# Altium PCB LPCB224R0.PcbDoc (part 1 of 2)
Units mm, origin at the board's own origin, x right, y up, seen from the top; angles counter-clockwise.
Board outline 139 x 166 mm, 4 copper layers (Top Layer, Internal Plane 1, Mid-Layer 1, Bottom Layer); 91 components, 73 nets, 403 pads, 171 vias.
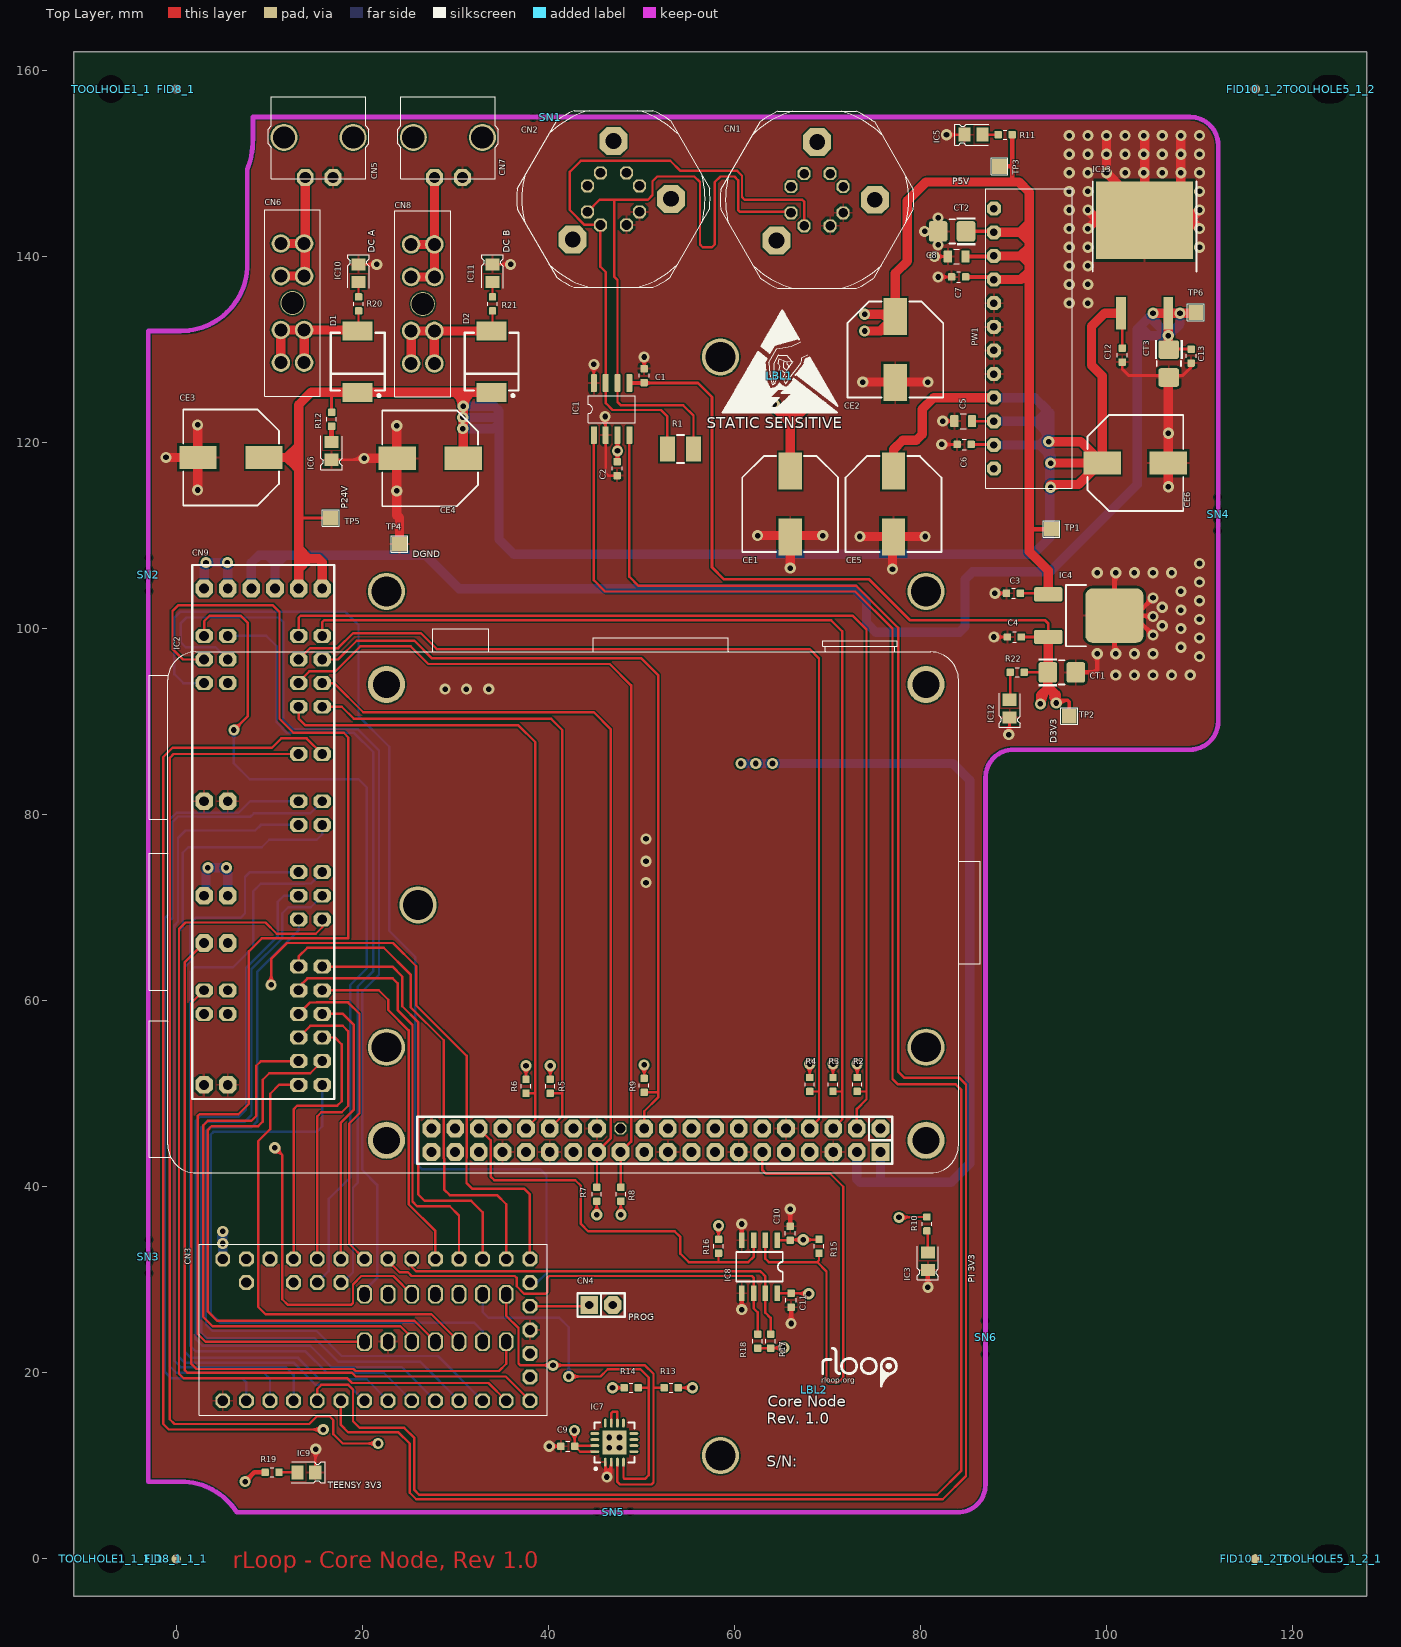
[diagram p0: Top Layer view]
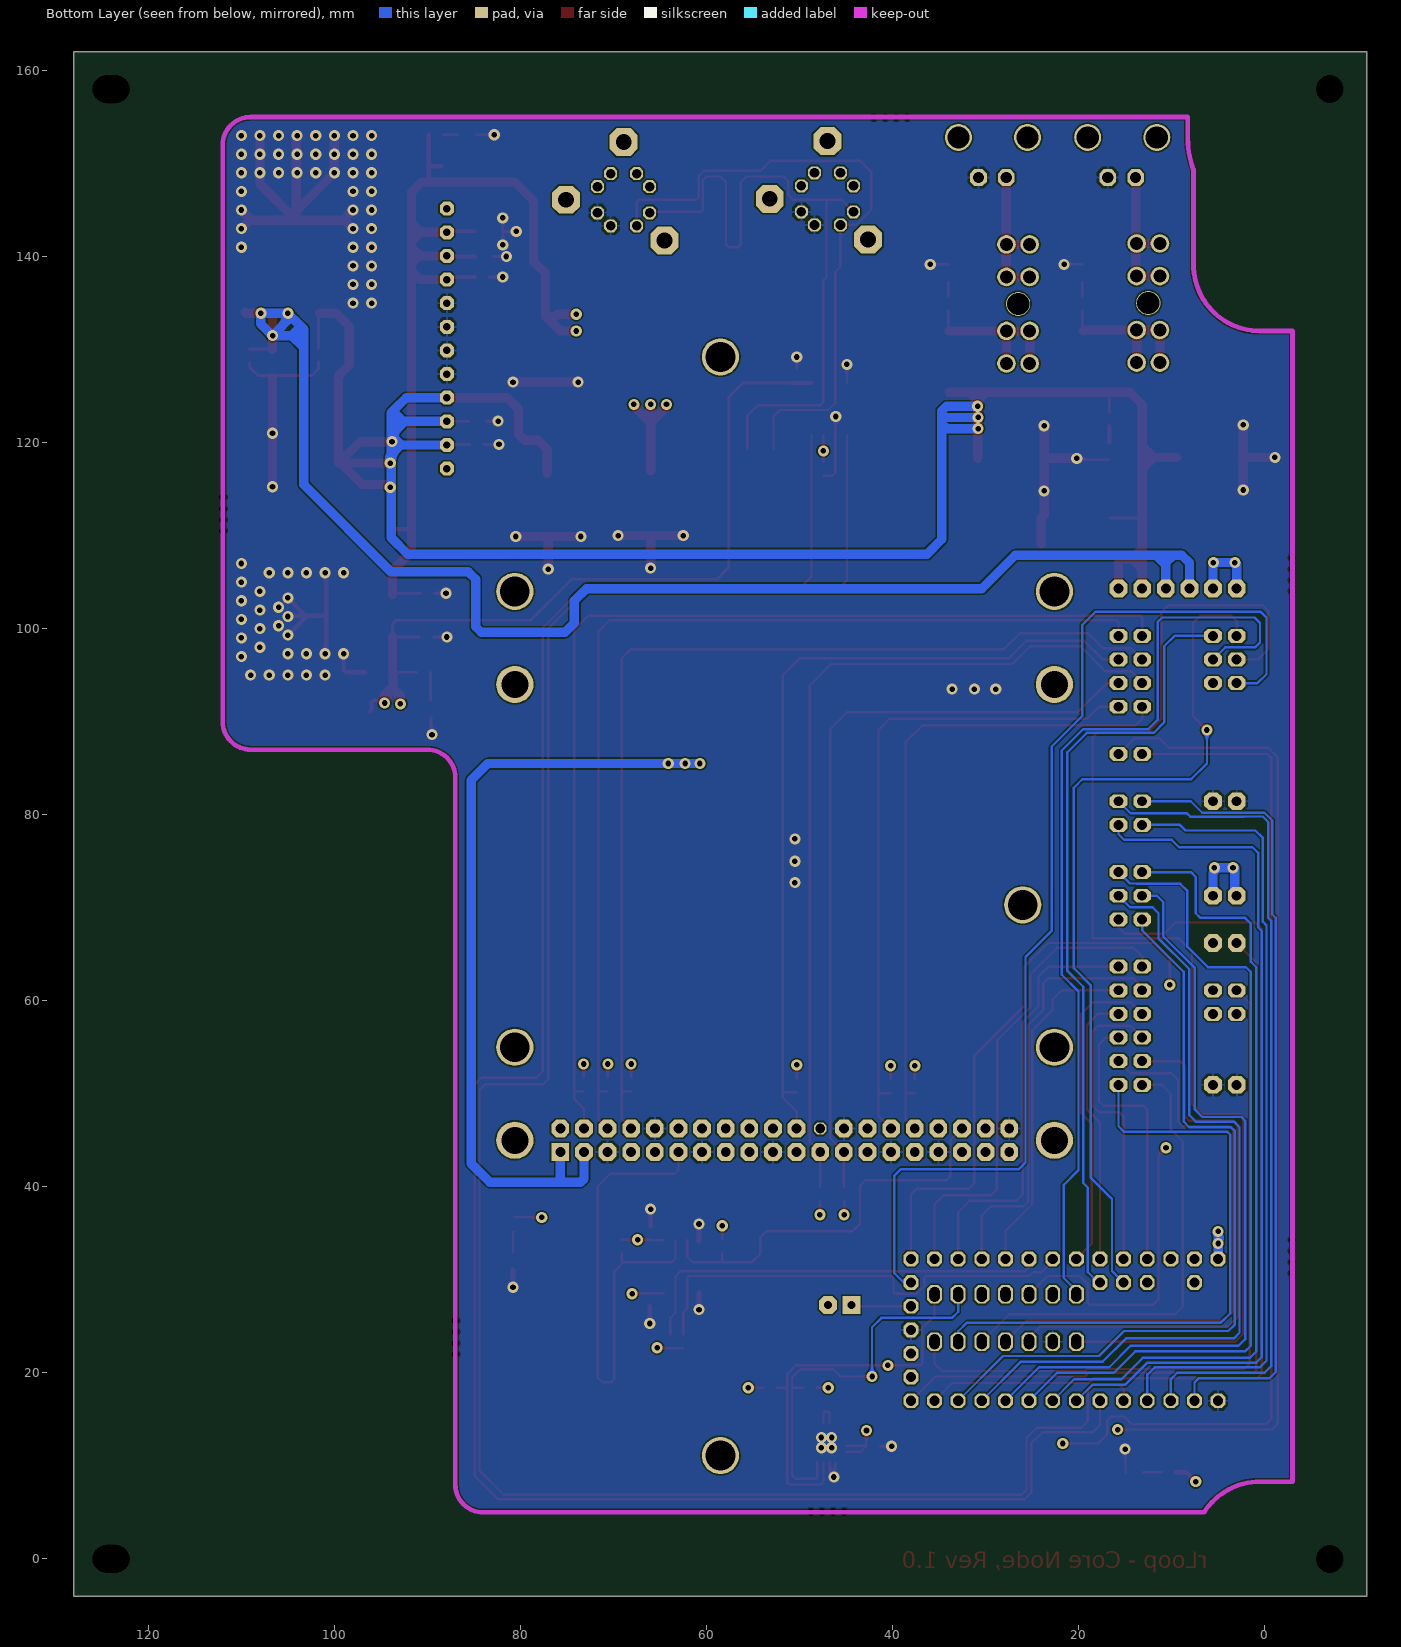
[diagram p1: Bottom Layer view, seen from below]
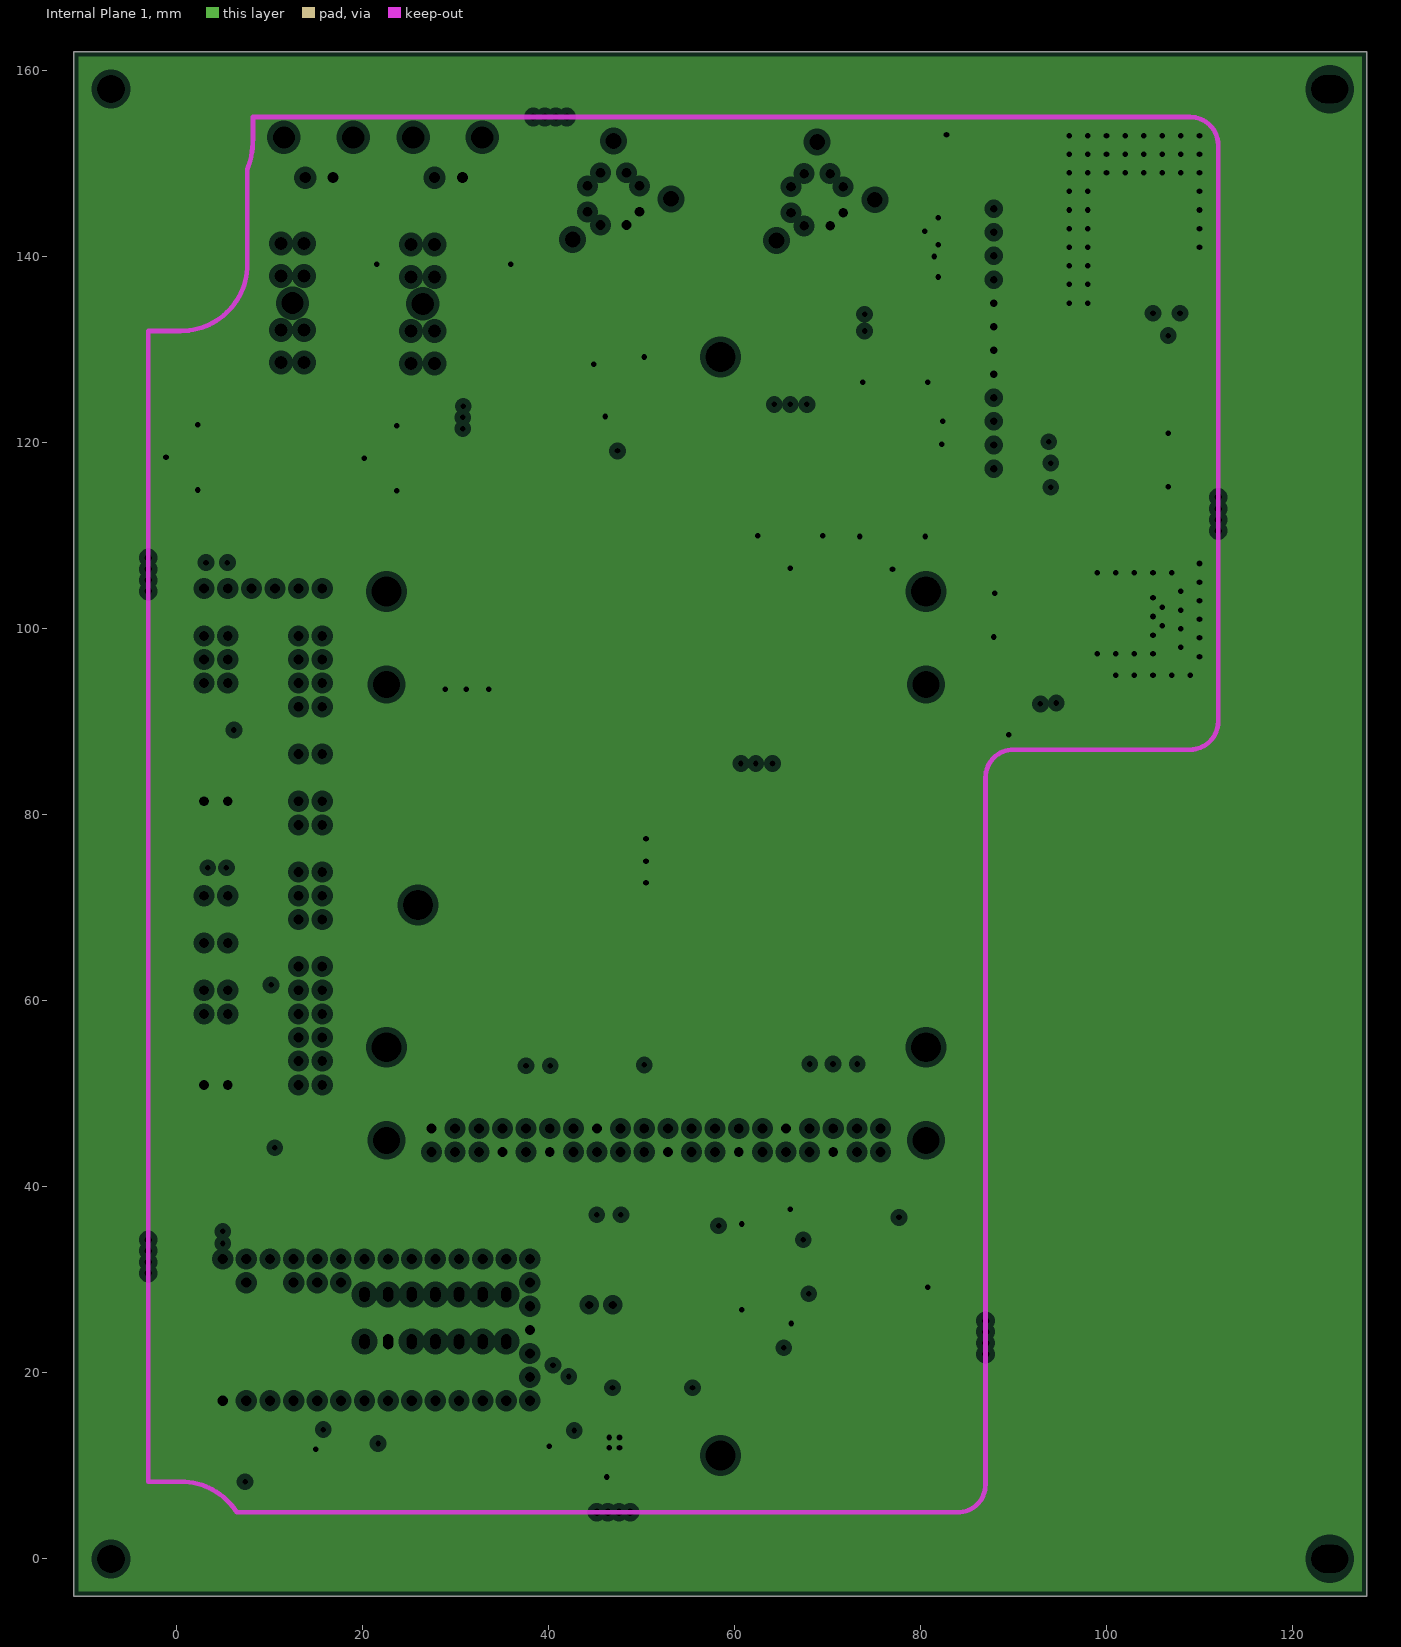
[diagram p2: Internal Plane 1, clearances drawn from the general rule]
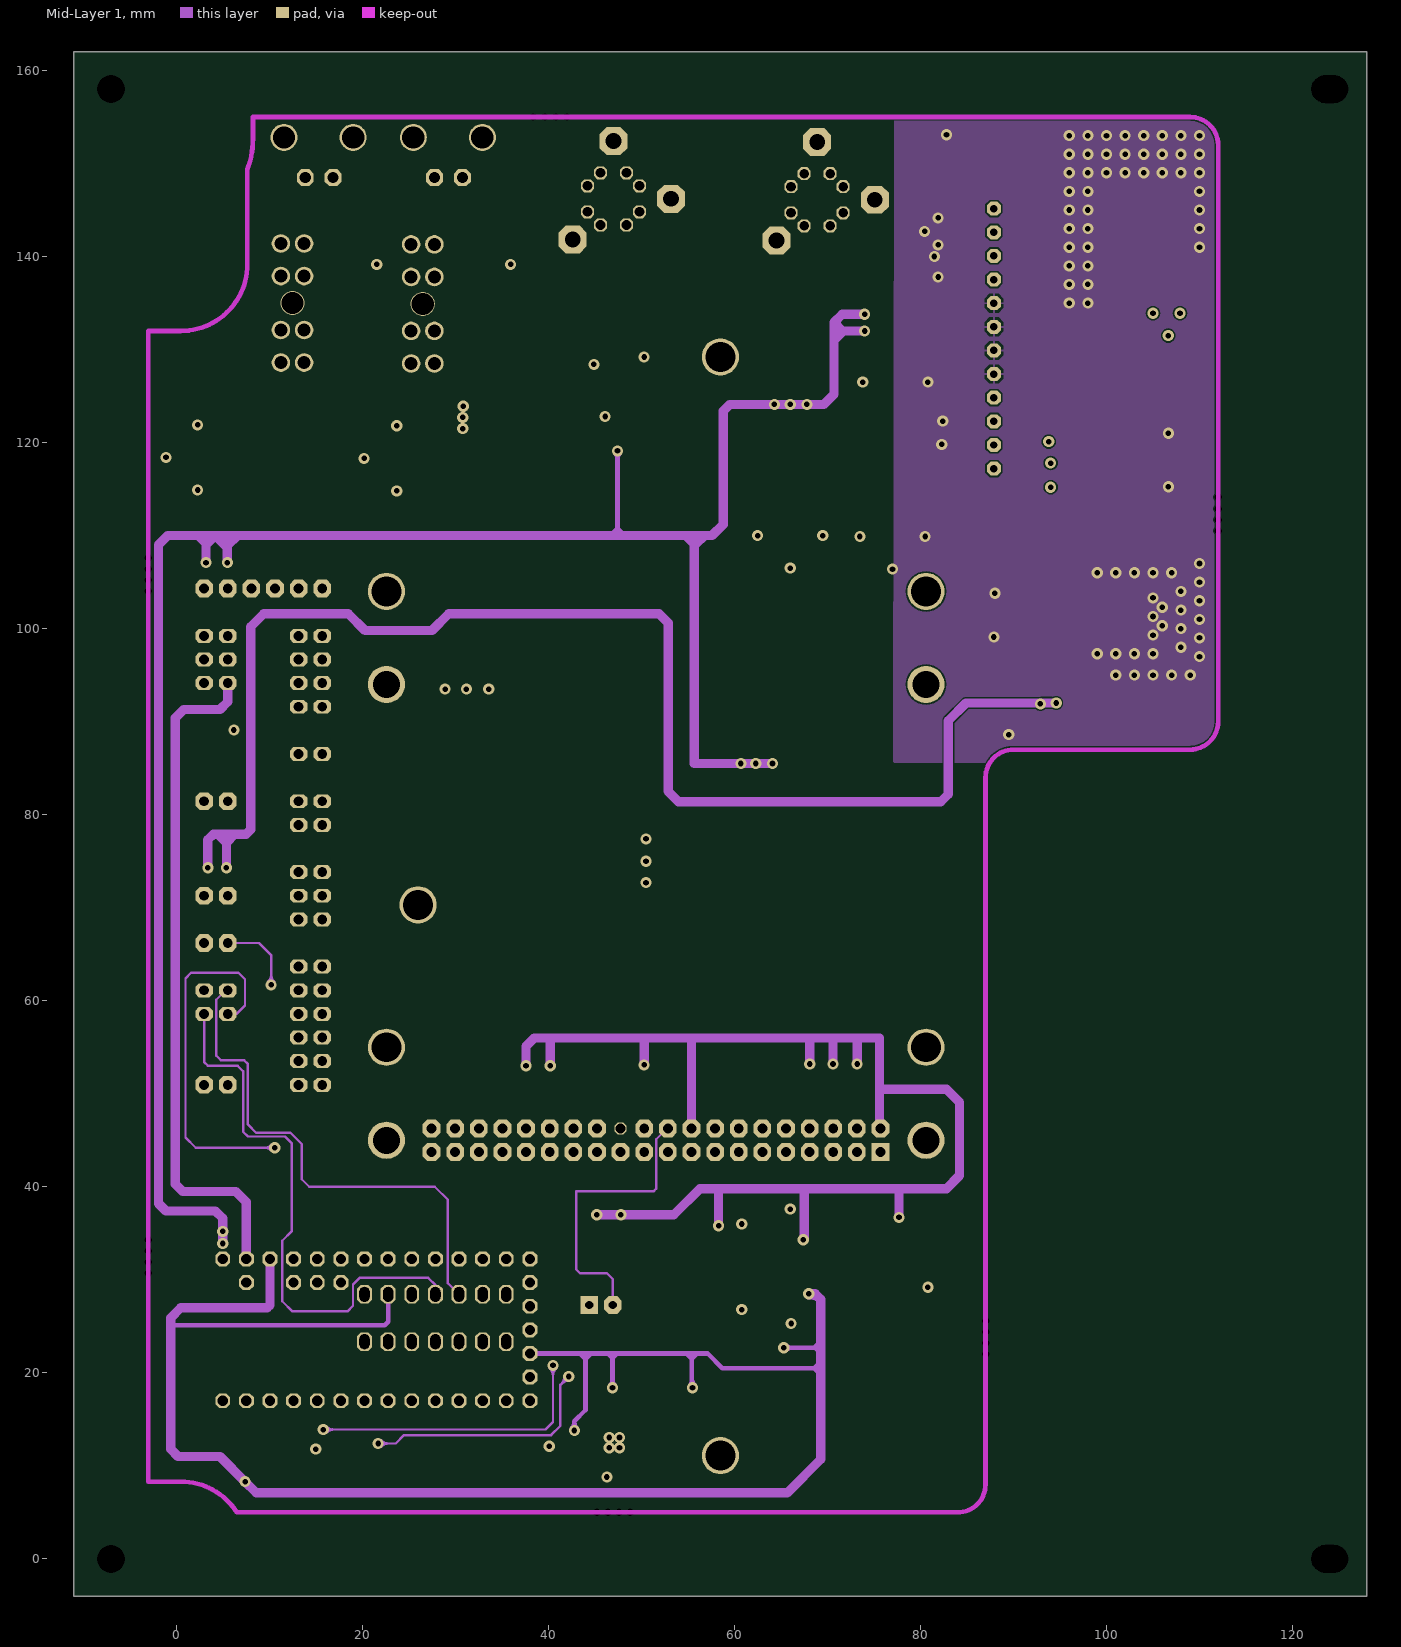
[diagram p3: Mid-Layer 1]

## Layer stack, top to bottom
Top Layer: signal copper 0.0356
Dielectric: core 0.32, FR-4, Dk 4.8
Internal Plane 1: plane copper 0.0356, net DGND
Dielectric: prepreg 0.32, FR-4, Dk 4.8
Mid-Layer 1: signal copper 0.0356
Dielectric: core 0.32, FR-4, Dk 4.8
Bottom Layer: signal copper 0.0356

## Board outline
-11,-4 -11,162 128,162 128,-4

## Design rules (kind name [scope] priority, off if disabled: settings)
Clearance [All] p1: gap=0.16
HoleSize [All] p1: absolutevalues=TRUE maxlimit=4 minlimit=0.025 maxpercent=80.000 minpercent=20.000
MinimumSolderMaskSliver [All] p1 off: minsoldermaskwidth=0.1
PlaneClearance [All] p1: clearance=0.6
PlaneConnect [All] p1: planeconnectstyle=Direct reliefexpansion=0.508 reliefentries=4 reliefconductorwidth=0.254 reliefairgap=0.254
PolygonConnect [isVia] p1: connectstyle=Direct reliefconductorwidth=0.254 reliefentries=4 polygonreliefangle="90 Angle" airgapwidth=0.254
PolygonConnect PolygonConnect_1 [All] p2: connectstyle=Relief reliefconductorwidth=0.254 reliefentries=4 polygonreliefangle="90 Angle" airgapwidth=0.254
RoomDefinition "LPCB224 - OVERVIEW" [InComponentClass('LPCB224 - OVERVIEW')] p1: confinementstyle=ConfineIn formatcopy=TRUE lockcomponents=FALSE outline -79.611,-125.874 -28.811,-125.874 -28.811,-100.474 -79.611,-100.474
RoomDefinition "U_LPCB224 - CORE CONNECTOR" [InComponentClass('U_LPCB224 - CORE CONNECTOR')] p2: confinementstyle=ConfineIn formatcopy=TRUE lockcomponents=FALSE outline -79.611,-125.874 -28.811,-125.874 -28.811,-100.474 -79.611,-100.474
RoomDefinition "U_LPCB224 - TEENSY" [InComponentClass('U_LPCB224 - TEENSY')] p3: confinementstyle=ConfineIn formatcopy=TRUE lockcomponents=FALSE outline -79.611,-125.874 -28.811,-125.874 -28.811,-100.474 -79.611,-100.474
RoomDefinition "U_LPCB224 - PSU" [InComponentClass('U_LPCB224 - PSU')] p4: confinementstyle=ConfineIn formatcopy=TRUE lockcomponents=FALSE outline -79.611,-125.874 -28.811,-125.874 -28.811,-100.474 -79.611,-100.474
RoomDefinition "U_LPCB224 - PI" [InComponentClass('U_LPCB224 - PI')] p5: confinementstyle=ConfineIn formatcopy=TRUE lockcomponents=FALSE outline -79.611,-125.874 -28.811,-125.874 -28.811,-100.474 -79.611,-100.474
RoomDefinition "U_LPCB224 - POWER INPUT" [InComponentClass('U_LPCB224 - POWER INPUT')] p6: confinementstyle=ConfineIn formatcopy=TRUE lockcomponents=FALSE outline -79.611,-125.874 -28.811,-125.874 -28.811,-100.474 -79.611,-100.474
RoomDefinition "U_LPCB224 - CAN" [InComponentClass('U_LPCB224 - CAN')] p7: confinementstyle=ConfineIn formatcopy=TRUE lockcomponents=FALSE outline -79.611,-125.874 -28.811,-125.874 -28.811,-100.474 -79.611,-100.474
RoutingVias [All] p1: holewidth=0.6 width=1.2 viastyle="Through Hole" minholewidth=0.6 minwidth=1.2 maxholewidth=1 maxwidth=3
SilkToSilkClearance [All] p1 off: silktosilkclearance=0.1
SilkToSolderMaskClearance [IsPad] p1 off: minsilkscreentomaskgap=0.1 clearancetoexposedcopper=TRUE
SolderMaskExpansion [All] p1: expansion=0.102
Width [All] p1: maxlimit=2 minlimit=0.254 preferedwidth=0.254
22 further rules are at their usual default settings.

## Classes and differential pairs
component class "U_LPCB224 - POWER INPUT": CE3 CE4 CN5 CN6 CN7 CN8 D1 D2 IC10 IC11 R20 R21
component class "U_LPCB224 - TEENSY": C9 C10 C11 CN3 CN4 IC7 IC8 IC9 R13 R14 R15 R16 R17 R18 R19
component class "U_LPCB224 - PSU": C3 C4 C5 C6 C7 C8 C12 C13 CE1 CE2 CE5 CE6 CT1 CT2 CT3 IC4 IC5 IC6 IC12 IC13 PW1 R11 R12 R22 TP1 TP2 TP3 TP4 TP5 TP6
component class "U_LPCB224 - PI": IC2 IC3 R2 R3 R4 R5 R6 R7 R8 R9 R10
component class "U_LPCB224 - CAN": C1 C2 CN1 CN2 IC1 R1
component class "U_LPCB224 - CORE CONNECTOR": CN9
component class "LPCB224 - OVERVIEW": LBL1 LBL2 SN1 SN2 SN3 SN4 SN5 SN6

## Components (designator, comment, footprint, x,y, rotation, side; value= is the part's Value field where it differs from the comment)
C1 "100n / 50V / 10% / SMD 0603" LFP011__CC1608-0603-IPC7351_B 50.3,127.205 r90 top
C2 "100n / 50V / 10% / SMD 0603" LFP011__CC1608-0603-IPC7351_B 47.4,117.205 r270 top
C3 "100n / 50V / 10% / SMD 0603" LFP011__CC1608-0603-IPC7351_B 90,103.805 r180 top
C4 "100n / 50V / 10% / SMD 0603" LFP011__CC1608-0603-IPC7351_B 90.1,99.105 r180 top
C5 "1uF / 50V / 10% / SMD 0805" LFP010__CC2012-0805-IPC7351_B 84.6,122.305 r180 top
C6 "100n / 50V / 10% / SMD 0603" LFP011__CC1608-0603-IPC7351_B 84.7,119.805 r180 top
C7 "100n / 50V / 10% / SMD 0603" LFP011__CC1608-0603-IPC7351_B 84.1,137.805 r180 top
C8 "1uF / 50V / 10% / SMD 0805" LFP010__CC2012-0805-IPC7351_B 83.9,140.005 r180 top
C9 "100n / 50V / 10% / SMD 0603" LFP011__CC1608-0603-IPC7351_B 42.1,12.105 r180 top
C10 "100n / 50V / 10% / SMD 0603" LFP011__CC1608-0603-IPC7351_B 66,35.005 r90 top
C11 "100n / 50V / 10% / SMD 0603" LFP011__CC1608-0603-IPC7351_B 66.1,27.805 r270 top
C12 "100n / 50V / 10% / SMD 0603" LFP011__CC1608-0603-IPC7351_B 101.7,129.4 r270 top
C13 "100n / 50V / 10% / SMD 0603" LFP011__CC1608-0603-IPC7351_B 109.1,129.3 r270 top
CE1 "330uF / 35V / 20% / SMD 10x10" LFP041__NICHICON_WT_10X10 66,113.405 r270 top
CE2 "330uF / 35V / 20% / SMD 10x10" LFP041__NICHICON_WT_10X10 77.3,130.005 r270 top
CE3 "330uF / 35V / 20% / SMD 10x10" LFP041__NICHICON_WT_10X10 5.9,118.405 r180 top
CE4 "330uF / 35V / 20% / SMD 10x10" LFP041__NICHICON_WT_10X10 27.3,118.305 r180 top
CE5 "330uF / 35V / 20% / SMD 10x10" LFP041__NICHICON_WT_10X10 77.1,113.405 r270 top
CE6 "330uF / 35V / 20% / SMD 10x10" LFP041__NICHICON_WT_10X10 103.1,117.8 r0 top
CN1 "2232331-1" 2232331-1 68.9,146.105 r0 top locked
CN2 "2232331-1" 2232331-1 47,146.205 r0 top locked
CN3 "TEENSY_V3.2" TEENSY_V3.2 5,17 r90 top locked
CN4 "HDR-2X1" HDR-2X1 44.4,27.3 r0 top
CN5 "1445054-2" 1445054-2 15.3,152.805 r180 top
CN6 "SI-H-FKS 30" SI-H-FKS-30 12.5,135.005 r90 top
CN7 "1445054-2" 1445054-2 29.2,152.805 r180 top
CN8 "SI-H-FKS 30" SI-H-FKS-30 26.5,134.905 r90 top
CN9 "RLOOP_NODE_CORE" RLOOP_NODE_CORE 3,104.305 r270 top locked
CT1 "22uF / 16V / 10% / SMD TC3528" LFP018__TC3528 95.2,95.305 r0 top
CT2 "22uF / 16V / 10% / SMD TC3528" LFP018__TC3528 83.4,142.705 r180 top
CT3 "22uF / 16V / 10% / SMD TC3528" LFP018__TC3528 106.7,128.5 r270 top
D1 "S3M-E3/57T" LFP040__DO-214AB 19.5,128.705 r90 top
D2 "S3M-E3/57T" LFP040__DO-214AB 33.9,128.705 r90 top
FID8_1 "FIDUCIAL" FIDTOP 0,158 r0 top
FID8_1_1_1 "FIDUCIAL" FIDTOP 0,0 r0 top
FID10_1_2 "FIDUCIAL" FIDTOP 116,158 r0 top
FID10_1_2_1 "FIDUCIAL" FIDTOP 116,0 r0 top
IC1 "MCP2562T-E/SN" LFP017__SO-G8/Y1.9 46.8,123.605 r0 top
IC2 "RASPBERRY_PI_B" RASPBERRY_PI_B 80.6,45 r180 top locked
IC3 "EL-17-21VGC/TR8" CR2012-0805-LED 80.8,32.005 r90 top
IC4 "NCV4274DT33RKG" LFP019__369A-13 98.3,101.405 r270 top
IC5 "EL-17-21VGC/TR8" CR2012-0805-LED 85.705,153.1 r0 top
IC6 "EL-17-21VGC/TR8" CR2012-0805-LED 16.7,119.105 r90 top
IC7 "TSYS01" LFP135__QFN65P400X400X80_HS-17M 47.1,12.5 r0 top
IC8 "ISO1540DR" LFP097__SOIC150-8 62.7,31.405 r180 top
IC9 "EL-17-21VGC/TR8" CR2012-0805-LED 14,9.305 r180 top
IC10 "EL-17-21VGC/TR8" CR2012-0805-LED 19.6,138.205 r270 top
IC11 "EL-17-21VGC/TR8" CR2012-0805-LED 34,138.205 r270 top
IC12 "EL-17-21VGC/TR8" CR2012-0805-LED 89.6,91.405 r90 top
IC13 "NCV8674DS120G" LFP082__D2PAK 104.1,138.4 r0 top
LBL1 "STATIC LABEL" STATIC_LABEL 64.9,127.2 r0 top
LBL2 "RLOOP_LOGO" RLOOP_LOGO 68.6,18.205 r0 top
PW1 "R-625.0P" R-625.0P 87.9,117.205 r90 top locked
R1 "121R / 0.33W / 1% / SMD 1210" LFP028__CR3225-1210 54.2,119.305 r0 top
R2 "10K / 0.1W / 1% / SMD 0603" LFP020__CR1608-0603-IPC7351_B 73.2,51 r270 top
R3 "10K / 0.1W / 1% / SMD 0603" LFP020__CR1608-0603-IPC7351_B 70.6,51 r270 top
R4 "10K / 0.1W / 1% / SMD 0603" LFP020__CR1608-0603-IPC7351_B 68.1,51 r270 top
R5 "10K / 0.1W / 1% / SMD 0603" LFP020__CR1608-0603-IPC7351_B 40.2,50.8 r270 top
R6 "10K / 0.1W / 1% / SMD 0603" LFP020__CR1608-0603-IPC7351_B 37.6,50.8 r270 top
R7 "10K / 0.1W / 1% / SMD 0603" LFP020__CR1608-0603-IPC7351_B 45.2,39.2 r90 top
R8 "10K / 0.1W / 1% / SMD 0603" LFP020__CR1608-0603-IPC7351_B 47.8,39.2 r90 top
R9 "10K / 0.1W / 1% / SMD 0603" LFP020__CR1608-0603-IPC7351_B 50.3,50.9 r270 top
R10 "2.2K / 0.1W / 1% / SMD 0603" LFP020__CR1608-0603-IPC7351_B 80.7,36.005 r90 top
R11 "2.2K / 0.1W / 1% / SMD 0603" LFP020__CR1608-0603-IPC7351_B 89.105,153.1 r0 top
R12 "2.2K / 0.1W / 1% / SMD 0603" LFP020__CR1608-0603-IPC7351_B 16.7,122.505 r90 top
R13 "2.2K / 0.1W / 1% / SMD 0603" LFP020__CR1608-0603-IPC7351_B 53.2,18.405 r0 top
R14 "2.2K / 0.1W / 1% / SMD 0603" LFP020__CR1608-0603-IPC7351_B 48.9,18.405 r180 top
R15 "2.2K / 0.1W / 1% / SMD 0603" LFP020__CR1608-0603-IPC7351_B 69.1,33.605 r90 top
R16 "2.2K / 0.1W / 1% / SMD 0603" LFP020__CR1608-0603-IPC7351_B 58.3,33.605 r90 top
R17 "2.2K / 0.1W / 1% / SMD 0603" LFP020__CR1608-0603-IPC7351_B 63.9,23.405 r270 top
R18 "2.2K / 0.1W / 1% / SMD 0603" LFP020__CR1608-0603-IPC7351_B 62.5,23.405 r270 top
R19 "2.2K / 0.1W / 1% / SMD 0603" LFP020__CR1608-0603-IPC7351_B 10.3,9.305 r180 top
R20 "2.2K / 0.1W / 1% / SMD 0603" LFP020__CR1608-0603-IPC7351_B 19.6,134.905 r270 top
R21 "2.2K / 0.1W / 1% / SMD 0603" LFP020__CR1608-0603-IPC7351_B 34,134.905 r270 top
R22 "2.2K / 0.1W / 1% / SMD 0603" LFP020__CR1608-0603-IPC7351_B 90.4,95.305 r0 top
SN1 "PCB_SNAPOUT" SNAPOUT_NEW 42,155 r180 top
SN2 "PCB_SNAPOUT" SNAPOUT_NEW -3,104.005 r90 top
SN3 "PCB_SNAPOUT" SNAPOUT_NEW -3,30.705 r90 top
SN4 "PCB_SNAPOUT" SNAPOUT_NEW 112,110.505 r90 top
SN5 "PCB_SNAPOUT" SNAPOUT_NEW 48.8,5 r180 top
SN6 "PCB_SNAPOUT" SNAPOUT_NEW 87,22.005 r90 top
TOOLHOLE1_1 "Comment" TOOL-1#1 -7,158 r0 top
TOOLHOLE1_1_1_1 "Comment" TOOL-1#1 -7,0 r0 top
TOOLHOLE5_1_2 "Comment" TOOL-1#2 124,158 r0 top
TOOLHOLE5_1_2_1 "Comment" TOOL-1#2 124,0 r0 top
TP1 "SMD_TP" SMD-TP 94.1,110.7 r90 top
TP2 "SMD_TP" SMD-TP 96,90.605 r0 top
TP3 "SMD_TP" SMD-TP 88.505,149.7 r0 top
TP4 "SMD_TP" SMD-TP 24,109.105 r90 top
TP5 "SMD_TP" SMD-TP 16.6,111.905 r90 top
TP6 "SMD_TP" SMD-TP 109.6,134 r90 top

## Footprints (in the part's own frame and the unit in brackets; to place one, negate y for a bottom-side part, rotate by r counter-clockwise, add the part's x,y. Pads: shape width x height; smd on the part's side, far side on the other; paste and mask are expansions set on the pad)
1445054-2 [mm]
  oct 1.8x1.8 hole 1.2: 1(1.435,4.32) 2(-1.565,4.32)
  round 2.9 hole 2.4: B(-3.715,0) B(3.715,0)
  silkscreen extent -5.4,-4.36 5.4,4.46
2232331-1 [mm]
  oct 1.4x1.4 hole 1.05: 1(-1.4,-2.8) 2(-2.8,-1.4) 3(-2.8,1.4) 4(-1.4,2.8) 5(1.4,2.8) 6(2.8,1.4) 7(2.8,-1.4) 8(1.4,-2.8)
  oct 3x3 hole 1.7: B(-4.38,-4.38) B(0,6.2) B(6.2,0)
  silkscreen extent -10.41,-9.51 10.39,9.49
CR2012-0805-LED [mm]
  rect 1.3x1.5 smd: A(0.95,0) K(-0.95,0)
  silkscreen extent -2.01,-1.14 1.63,1.14
FIDTOP [mil]
  round 40 smd mask+39.37: 1(0,0)
HDR-2X1 [mil] "2-Pin connector"
  rect 75x75 hole 35: 1(0,0)
  oct 75x75 hole 35: 2(100,0)
  silkscreen extent -50,-50 150,50
LFP010__CC2012-0805-IPC7351_B [mm]
  rrect25% 0.9x1.3 smd paste-0.01: 1(-0.95,0) 2(0.95,0)
  silkscreen extent -0.3,-0.8 0.3,0.8
LFP011__CC1608-0603-IPC7351_B [mm]
  rrect25% 0.8x0.8 smd: 1(-0.75,0) 2(0.75,0)
  silkscreen extent -0.2,-0.55 0.2,0.55
LFP017__SO-G8/Y1.9 [mm]
  rrect25% 0.65x1.9 smd: 1(-1.905,-2.8) 2(-0.635,-2.8) 3(0.635,-2.8) 4(1.905,-2.8) 5(1.905,2.8) 6(0.635,2.8) 7(-0.635,2.8) 8(-1.905,2.8)
  silkscreen extent -2.52,-1.45 2.52,1.45
LFP018__TC3528 [mm]
  rrect25% 2x2.2 smd: 1(-1.5,0) 2(1.5,0)
  silkscreen extent -2.51,-1.5 0.3,1.5
LFP019__369A-13 [mil]
  rrect25% 60x120 smd: 1(-90,-179.49) 3(90,-179.49)
  rrect25% 230x245 smd paste-196.85: 4(0,100.75)
  silkscreen extent -130,-104 130,-19
LFP020__CR1608-0603-IPC7351_B [mm]
  rrect25% 0.8x0.8 smd: 1(-0.75,0) 2(0.75,0)
  silkscreen extent -0.2,-0.5 0.2,0.5
LFP028__CR3225-1210 [mm]
  rect 1.6x2.7 smd: 1(-1.4,0) 2(1.4,0)
  silkscreen extent -0.4,-1.5 0.4,1.5
LFP040__DO-214AB [mm]
  rect 2.032x3.2 smd: 1(-3.3,0) 2(3.3,0)
  silkscreen extent -3.8,-2.9 3.1,2.9
LFP041__NICHICON_WT_10X10 [mm]
  rect 4x2.5 smd: 1(-3.55,0) 2(3.55,0)
  silkscreen extent -5.15,-5.15 5.15,5.15
LFP082__D2PAK [mm] "D2-PAK/TO-263-AB; 3 Leads (1 Cropped); Body 15.5 (inc. leads) x 10.5 mm (LxW max)"
  rect 1.05x3.5 smd: 1(-2.54,-4.5) 3(2.54,-4.5)
  rect 10.4x8.38 smd paste-1: 2(0,5.5)
  silkscreen extent -5.58,0 5.58,9.7
LFP097__SOIC150-8 [mm] "Small Outline, Plastic, Narrow; 8 Leads; Body Width 3.8 mm; Pitch 1.27 mm"
  rrect10% 0.6x1.7 smd paste-0.05: 1(-1.905,-2.85) 2(-0.635,-2.85) 3(0.635,-2.85) 4(1.905,-2.85) 5(1.905,2.85) 6(0.635,2.85) 7(-0.635,2.85) 8(-1.905,2.85)
  silkscreen extent -2.5,-1.6 2.5,1.6
LFP135__QFN65P400X400X80_HS-17M [mm] "QFN, 16-Leads, Body 4.00x4.00mm, Pitch 0.65mm, Thermal Pad 2.60x2.60mm, IPC Low Density"
  oval 0.3x0.95 smd paste-0.05: 1(-0.975,-2.1) 2(-0.325,-2.1) 3(0.325,-2.1) 4(0.975,-2.1) 9(0.975,2.1) 10(0.325,2.1) 11(-0.325,2.1) 12(-0.975,2.1)
  oval 0.95x0.3 smd paste-0.05: 5(2.1,-0.975) 6(2.1,-0.325) 7(2.1,0.325) 8(2.1,0.975) 13(-2.1,0.975) 14(-2.1,0.325) 15(-2.1,-0.325) 16(-2.1,-0.975)
  rect 2.6x2.6 smd paste-5: PAD(0,0)
  silkscreen extent -2.15,-2.92 2.15,2.15
R-625.0P [mm]
  oct 1.5x1.5 hole 0.8: 1(0,0) 2(2.54,0) 3(5.08,0) 4(7.62,0) 5(10.16,0) 6(12.7,0) 7(15.24,0) 8(17.78,0) 9(20.32,0) 10(22.86,0) 11(25.4,0) 12(27.94,0)
  silkscreen extent -2.13,-8.4 30.07,0.9
RASPBERRY_PI_B [mm]
  oct 1.905x1.905 hole 1.067: 1(4.89,-1.27) 3(7.43,-1.27) 4(7.43,1.27) 5(9.97,-1.27) 6(9.97,1.27) 7(12.51,-1.27) 8(12.51,1.27) 9(15.05,-1.27) 10(15.05,1.27) 11(17.59,-1.27) 12(17.59,1.27) 13(20.13,-1.27) 14(20.13,1.27) 15(22.67,-1.27) 16(22.67,1.27) 17(25.21,-1.27) 18(25.21,1.27) 19(27.75,-1.27) 20(27.75,1.27) 21(30.29,-1.27) 22(30.29,1.27) 24(32.83,1.27) 25(35.37,-1.27) 26(35.37,1.27) 27(37.91,-1.27) 28(37.91,1.27) 29(40.45,-1.27) 30(40.45,1.27) 31(42.99,-1.27) 32(42.99,1.27) 33(45.53,-1.27) 34(45.53,1.27) 35(48.07,-1.27) 36(48.07,1.27) 37(50.61,-1.27) 38(50.61,1.27) 39(53.15,-1.27) 40(53.15,1.27)
  rect 1.905x1.905 hole 1.067: 2(4.89,1.27)
  oct 1.3x1.3 hole 1.067: 23(32.83,-1.27)
  round 4 hole 2.9: B(0,0) B(0,-49) B(58,0) B(58,-49)
  silkscreen extent -5.83,-55 83.5,3.5
RLOOP_LOGO [mm]
  silkscreen extent 0.89,0.39 8.82,4.45
RLOOP_NODE_CORE [mil]
  oct 59.06x75 hole 42: A10(200,0) A11(200,100) A12(300,0) A13(300,100) A14(400,0) AGND(400,100) ID1(200,400) ID2(200,500) ID3(300,400) ID4(500,500) ID5(500,400) ID6(400,500) ID7(400,400) ID8(300,500) SCL(700,500) SDA(700,400) T0(900,400) T1(900,500) T2(1000,400) T5(1000,500) T6(1200,400) T7(1200,500) T8(1300,400) T9(1300,500) T10(1400,400) T11(1400,500) T14(1600,400) T15(1600,500) T16(1700,400) T17(1700,500) T20(1800,400) T21(1800,500) T22(1900,400) T23(1900,500) T24(2000,400) T25(2000,500) T26(2100,400) T27(2100,500) T28(1700,0) T31(1700,100) T32(1800,0) T33(1800,100)
  oct 75x75 hole 42: D3V31(1300,0) D3V32(1300,100) D12V1(0,300) D12V2(0,200) GND1(2100,100) GND2(2100,0) GND3(900,100) GND4(900,0) P5V1(0,0) P5V2(0,100) P24V1(0,400) P24V2(0,500) T12(1500,0) T13(1500,100)
  silkscreen extent -100,-50 2160,550
SI-H-FKS-30 [mm] "Connector, Blade Fuse Holder, 5mm Terminals, 30A Max, PTH"
  round 2 hole 1.4: 1(2.9,-1.25) 1(2.9,1.25) 1(6.4,-1.25) 1(6.4,1.25) 2(-6.4,-1.25) 2(-6.4,1.25) 2(-2.9,-1.25) 2(-2.9,1.25)
  round 2.6 hole 2.4: B(0,0)
  silkscreen extent -10,-3 10,3
SMD-TP [mm]
  rect 1.6x1.6 smd paste-2: 1(0,0)
  silkscreen extent -0.9,-0.9 0.9,0.9
SNAPOUT_NEW [mm]
  round 0.4 hole 0.8 unplated: 0(0,0) 0(1.2,0) 0(2.4,0) 0(3.6,0)
STATIC_LABEL [mm]
  silkscreen extent -6.16,-3.95 6.18,7.02
TEENSY_V3.2 [mm]
  oct 1.6x1.6 hole 1.1: 0(0,-2.54) 1(0,-5.08) 2(0,-7.62) 3(0,-10.16) 3V3_1(15.24,-5.08) 3V3_2(5.08,-33.02) 4(0,-12.7) 5(0,-15.24) 6(0,-17.78) 7(0,-20.32) 8(0,-22.86) 9(0,-25.4) 10(0,-27.94) 11(0,-30.48) 12(0,-33.02) 13(15.24,-33.02) 14(15.24,-30.48) 15(15.24,-27.94) 16(15.24,-25.4) 17(15.24,-22.86) 18(15.24,-20.32) 19(15.24,-17.78) 20(15.24,-15.24) 21(15.24,-12.7) 22(15.24,-10.16) 23(15.24,-7.62) A10(12.7,-10.16) A11(12.7,-12.7) A14(12.7,-33.02) AGND(15.24,-2.54) AREF(12.7,-7.62) GND1(0,0) GND3(7.62,-33.02) PROG(10.16,-33.02) VBATT(2.54,-33.02) VIN(15.24,0) VUSB(12.7,-2.54)
  oct 2x1.6 hole 1.1 slot 1.6 at 0 deg: 3V3_3(11.43,-17.78) 24(6.35,-20.32) 25(6.35,-22.86) 26(6.35,-25.4) 27(6.35,-27.94) 28(6.35,-30.48) 29(11.43,-30.48) 30(11.43,-27.94) 31(11.43,-25.4) 32(11.43,-22.86) 33(11.43,-20.32) A12(6.35,-15.24) A13(11.43,-15.24) GND2(6.35,-17.78)
  silkscreen extent -1.58,-34.9 16.82,2.54
TOOL-1#1 [mm]
  round 2.54 hole 3 unplated: TOOL(0,0)
TOOL-1#2 [mm]
  round 0.076 hole 3 slot 4 at 0 deg unplated: TOOL1(0,0)

## Part data
C1 C2 C3 C4 C6 C7 C9 C10 C11 C12 C13: "Capacitor, Ceramic Chip, 100nF (0.1uF), 50V, 5%, SMD 0603 [LCA016]"
C5 C8: "Capacitor, Ceramic Chip, 1uF, 50V, SMD 0805 [LCA098]"
CE1 CE2 CE3 CE4 CE5 CE6: "Capacitor, Aluminum Electrolytic, 330uF, 35V, 20%, SMD (10mm x 10mm) [LCA071]"
CN1 CN2: "Connector, M12 8 Way, PCB Mount"
CN4: "Header, 2.54mm (0.1in), 2 Pins x 1 Row (40 Per Row In Strip)"
CN5 CN7: "Connector, MATE-N-LOK, Header, 2 Way, PTH"
CN6 CN8: "Connector, Blade Fuse Holder, 5mm Terminals, 30A Max, PTH"
CN9: "rLoop Node Core Connector"
CT1 CT2 CT3: "Capacitor, Tantalum, 22uF, 16V, 10%, SMD TC3528 (BCASE) [LCA039]"
D1 D2: "Diode, General Purpose Rectifier, 3A, 200V, SMD DO-214AB [LIC189]"
IC1: "IC, High Speed CAN Transceiver, SMD SOIC8 [LIC522]"
IC2: "Raspberry Pi Model B"
IC3 IC5 IC6 IC9 IC10 IC11 IC12: "LED, SMD, 0805 Green [LIC016]"
IC4: "IC, Voltage Regulator, 400mA, 3.3V LDO, SMD DPAK [LIC233]"
IC7: "IC, Digital Temp Sensor, SMD QFN16 [LIC556]"
IC8: "IC, Digital Isolator for I2C, SMD SOIC8"
IC13: "IC, Voltage Regulator, 0.35A, 12V, SMD D2PAK [LIC294]"
PW1: "Non Isolated DC/DC Module"
R1: "Resistor, Ceramic Chip, 121R, 0.33W, 1%, SMD 1210 [LRE077]"
R2 R3 R4 R5 R6 R7 R8 R9: "Resistor, Ceramic Chip, 10K, 0.1W, 1%, SMD 0603 [LRE030]"
R10 R11 R12 R13 R14 R15 R16 R17 R18 R19 R20 R21 R22: "Resistor, Ceramic Chip, 2.2K, 0.1W, 1%, SMD 0603 [LRE027]"
TP1 TP2 TP3 TP4 TP5 TP6: "SMD Test Point"

## Free pads (board coordinates)
  round 4 hole 3.2: B(22.6,55) B(22.6,104) B(26,70.305) B(58.5,11.105) B(58.5,129.205) B(80.6,55) B(80.6,104)

## Via types
v1: diameter 1.2, hole 0.6, Top Layer to Bottom Layer, 171 vias

## Nets (pads, with @x,y where several pads share a name; then routed paths per layer and width w, separated by ;. In a path a pad name is that pad's centre, name@x,y a point inside that pad or via, vN(x,y) a via of type N, cw(c..) or ccw(c..) an arc to the next point about the centre after c; other vN are vias at no path point)
AGND: CN3.AGND CN9.AGND | length 73
  Mid-Layer 1 w1: CN9.AGND@5.54,94.145 5.54,92.145 4.7,91.305 0.8,91.305 -0.1,90.405 -0.1,40.305 0.7,39.505 6.4,39.505 7.54,38.365 CN3.AGND@7.54,32.24
CAN_H: CN1.1 CN2.1 IC1.7 R1.1 | length 69.7
  Top Layer w0.254: R1.1@52.8,119.305 52.8,122.805 52.1,123.505 46.9,123.505 46.165,124.24 IC1.7@46.165,126.405 46.165,136.67 46.165,138.335 45.6,138.9 CN2.1@45.6,143.405 43.895,143.405 42.3,145 42.3,149.1 43.505,150.305 53.1,150.305 54.2,149.205 60.3,149.205 60.814,148.691 60.814,146.391 61.1,146.105 67.3,146.105 67.5,145.905 CN1.1@67.5,143.305
CAN_L: CN1.2 CN2.2 IC1.6 R1.2 | length 76.2
  Top Layer w0.254: CN2.2@44.2,144.805 45.495,146.1 47.1,146.1 ; R1.2@55.6,119.305 55.6,122.905 54.5,124.005 47.8,124.005 47.435,124.37 IC1.6@47.435,126.405 47.435,137.465 47.1,137.8 47.1,146.1 ; CN1.2@66.1,144.705 66,144.805 60.6,144.805 60.4,145.005 60.4,148.205 60,148.605 58.505,148.605 57.9,148 57.9,141.3 57.6,141 56.6,141 56.3,141.3 56.3,148 55.695,148.605 51.705,148.605 51.2,148.1 51.2,146.6 50.7,146.1 47.1,146.1
D3V3: C1.1 C4.1 CN9.D3V31 CN9.D3V32 CT1.1 IC1.5 IC4.3 R22.2 TP2.1 | length 254.4
  Top Layer w0.3: 50.8,126.405 56.1,126.405 57.6,124.905 57.6,106.6 58.9,105.3 74.505,105.3 78.9,100.905 93.4,100.905 93.741,100.564 IC4.3@93.741,99.119 93.727,99.105 C4.1@90.85,99.105 ; R22.2@91.15,95.305 CT1.1@93.7,95.305 CT1.1@93.741,95.346
  Top Layer w0.4: IC1.5@48.705,126.405 50.8,126.405 ; v1@94.202,92.043 ccw(c93.505,92.11) 94,92.605 ; v1@94.562,92.403 cw(c94.495,93.099) 94,92.605 ; v1@94.948,91.808 cw(c95.8,91.326) 95.8,92.305 ; TP2.1@96.2,91.105 96,91.305 96,92.105 95.8,92.305 ; 94,92.605 94.3,92.305 94.6,92.305 95.8,92.305
  Top Layer w1: v1(92.9,91.905) 92.9,92.805 93.7,93.605 ; v1@93,91.905 cw(c95.39,91.915) 93.7,93.605 ; CT1.1@93.7,95.305 93.7,93.805 ; CT1.1@93.741,95.346 IC4.3@93.741,99.119 ; 93.793,93.712 cw(c92.086,92.005) v1@94.5,92.005 ; v1(94.6,92.005) 94.6,92.305 94.6,92.905 93.7,93.805 ; 93.7,93.605 93.7,93.805
  Mid-Layer 1 w1: v1(3.4,74.305) 3.4,77.305 4,77.905 4.5,77.905 ; v1(5.4,74.305) 5.4,77.005 ; 29.7,101.605 29.3,101.605 ; v1(94.6,92.005) 84.9,92.005 83,90.105 83,82.205 82.2,81.405 54,81.405 52.9,82.505 52.9,100.605 51.9,101.605 29.3,101.605 ; 4.5,77.905 5.5,77.905 ; 4.5,77.905 5.4,77.005 ; 5.4,77.005 5.4,77.805 5.5,77.905 ; 5.4,77.005 6.3,77.905 ; 5.5,77.905 6.3,77.905 ; 6.3,77.905 7.5,77.905 8,78.405 8,100.205 9.4,101.605 18.5,101.605 20.305,99.8 27.495,99.8 29.3,101.605
  Bottom Layer w1: CN9.D3V31@3,71.285 3.2,71.485 3.2,74.305 v1(3.4,74.305) 5,74.305 5.54,73.765 CN9.D3V32@5.54,71.285 ; 3.2,73.58 cw(c4.124,73.58) v1@3.471,74.234
D12V: C13.1 CN9.D12V1 CN9.D12V2 CT3.1 IC13.3 TP6.1 | length 168.2
  Top Layer w0.3: CT3.1@106.64,130.06 106.65,130.05 C13.1@109.1,130.05
  Top Layer w1: v1(105,133.9) IC13.3@106.64,133.9 ; CT3.1@106.64,130.06 v1(106.64,131.5) IC13.3@106.64,133.9 ; CT3.1@106.65,130.05 CT3.1@106.7,130 ; TP6.1@109.6,134 109.5,133.9 v1(107.9,133.9) IC13.3@106.64,133.9
  Bottom Layer w1: CN9.D12V2@8.08,104.305 8.08,107.08 8.9,107.9 9.8,107.9 ; CN9.D12V1@10.62,104.305 10.62,107.08 ; 31.7,104.3 30.4,104.3 ; 86.2,106.1 85.6,106.1 ; 103.35,130.25 104.6,131.5 ; v1@105.1,133.9 ccw(c107.176,133.9) 105.708,132.432 ; 9.8,107.9 10.62,107.08 ; 9.8,107.9 10.5,107.9 ; 10.5,107.9 10.62,107.78 10.62,107.08 ; 10.5,107.9 11.7,107.9 ; 10.62,107.08 10.88,107.08 11.7,107.9 ; 11.7,107.9 20.8,107.9 26.8,107.9 30.4,104.3 ; 30.4,104.3 72.9,104.3 74.2,103 74.2,100.6 75.2,99.6 84.2,99.6 84.8,100.2 84.8,105.3 85.6,106.1 ; 85.6,106.1 93.9,106.1 103.3,115.5 103.3,131.6 ; 103.3,131.6 103.4,131.5 104.6,131.5 ; 103.3,131.6 103.3,132.2 103.8,132.7 ; 103.8,132.7 103.8,132.3 104.6,131.5 ; 103.8,132.7 v1(105,133.9) ; 104.6,131.5 v1(106.64,131.5) ; v1(105,133.9) v1(107.9,133.9) 107.9,132.76 v1(106.64,131.5) ; v1(105,133.9) 105,133.14 v1(106.64,131.5)
DC_A: CN5.1 CN6.1 | length 15.7
  Top Layer w1: CN6.1@11.25,137.905 CN6.1@13.75,137.905 13.865,138.02 CN6.1@13.865,141.405 ; CN6.1@11.25,141.405 CN6.1@13.75,141.405 CN6.1@13.865,141.405 ; CN5.1@13.865,148.485 CN6.1@13.865,141.405
DC_B: CN7.1 CN8.1 | length 15.7
  Top Layer w1: CN8.1@25.25,137.805 CN8.1@27.75,137.805 27.765,137.82 CN7.1@27.765,148.485 ; CN8.1@25.25,141.305 CN8.1@27.75,141.305
DGND: C1.2 C2.2 C3.2 C4.2 C5.2 C6.2 C7.2 C8.2 C9.2 C10.2 C11.2 C12.2 C13.2 CE1.2 CE2.2 CE3.2 CE4.2 CE5.2 CE6.2 CN1.7 CN1.8 CN2.7 CN2.8 CN3.GND1 CN3.GND2 CN3.GND3 CN5.2 CN7.2 CN9.GND1 CN9.GND2 CN9.GND3 CN9.GND4 CT1.2 CT2.2 CT3.2 IC1.2 IC1.8 IC2.6 IC2.9 IC2.14 IC2.20 IC2.25 IC2.30 IC2.34 IC2.39 IC3.K IC4.4 IC5.K IC6.K IC7.1 IC7.2 IC7.PAD IC8.4 IC8.5 IC9.K IC10.K IC11.K IC12.K IC13.2 PW1.5 PW1.6 PW1.7 PW1.8 TP4.1 | length 252.3
  Top Layer w0.254: v1@14.666,11.47 cw(c13.979,10.783) 14.95,10.783 ; IC9.K@14.95,9.305 14.95,11.755 v1(15,11.805) ; 14.95,10.542 cw(c16.263,10.542) v1@15.334,11.47 ; 14.95,11.155 cw(c15.649,11.155) v1@15.155,11.65 ; IC6.K@16.7,118.155 20.05,118.155 v1(20.2,118.305) ; 18.696,118.155 ccw(c18.696,119.809) v1@19.866,118.639 ; 19.309,118.155 ccw(c19.309,119.195) v1@20.045,118.459 ; 19.42,118.155 cw(c19.42,117.525) v1@19.866,117.97 ; IC10.K@19.6,139.155 v1(21.55,139.155) v1@21.6,139.205 ; v1@21.216,138.82 ccw(c20.408,138.013) 20.408,139.155 ccw(c20.408,140.297) v1@21.216,139.489 ; IC11.K@34,139.155 v1(35.95,139.155) ; v1@35.616,138.82 ccw(c34.808,138.013) 34.808,139.155 ccw(c34.808,140.297) v1@35.616,139.489 ; v1(40.1,12.105) C9.2@41.35,12.105 ; v1@40.434,11.77 cw(c41.242,10.963) 41.242,12.105 cw(c41.242,13.247) v1@40.434,12.439 ; v1@44.566,128.07 cw(c43.77,127.275) IC1.8@44.895,127.275 ; IC1.8@44.895,126.405 44.895,128.4 v1(44.9,128.405) ; IC1.8@44.895,127.251 cw(c46.054,127.251) v1@45.234,128.07 ; v1@45.766,122.47 cw(c44.801,121.506) IC1.2@46.165,121.506 ; v1@45.945,122.65 cw(c45.414,122.119) 46.165,122.119 ; v1@45.966,9.139 ccw(c45.581,9.524) 46.125,9.524 ; v1@46.074,9.22 ccw(c45.432,10.4) IC7.2@46.775,10.4 ; v1(46.1,122.805) 46.165,122.74 IC1.2@46.165,120.805 46.165,116.74 46.45,116.455 C2.2@47.4,116.455 ; 46.125,9.756 ccw(c47.251,9.756) v1@46.455,8.959 ; IC7.1@46.125,10.369 ccw(c47.864,10.369) v1@46.634,9.139 ; IC7.1@46.125,10.4 46.125,8.98 v1(46.3,8.805) 46.775,9.28 ; 46.165,121.82 cw(c47.085,121.82) v1@46.434,122.47 ; v1@46.195,8.997 ccw(c45.664,9.972) IC7.2@46.775,9.972 ; v1@46.317,8.774 ccw(c45.897,9.545) 46.775,9.545 ; v1@46.502,9.232 ccw(c46.605,9.45) 46.775,9.28 ; v1@46.728,9.007 cw(c46.945,9.11) 46.775,9.28 ; IC7.2@46.775,10.4 46.775,9.28 ; v1@49.966,128.87 cw(c49.158,128.063) 50.3,128.063 cw(c51.442,128.063) v1@50.634,128.87 ; C1.2@50.3,127.955 v1(50.3,129.205) ; v1(82.805,153.1) IC5.K@84.755,153.1 ; v1@83.139,152.766 cw(c83.947,151.958) 83.947,153.1 cw(c83.947,154.242) v1@83.139,153.434
  Top Layer w0.3: v1(80.45,142.705) CT2.2@81.9,142.705 ; v1@80.768,142.386 cw(c81.536,141.618) 81.536,142.705 cw(c81.536,143.791) v1@80.768,143.023 ; v1(81.5,140.005) C8.2@82.95,140.005 ; v1@81.582,141.573 ccw(c80.814,142.341) 81.9,142.341 ccw(c82.986,142.341) v1@82.218,141.573 ; v1@81.582,143.836 cw(c80.814,143.068) 81.9,143.068 cw(c82.986,143.068) v1@82.218,143.836 ; v1@81.818,139.686 cw(c82.586,138.918) 82.586,140.005 cw(c82.586,141.091) v1@81.818,140.323 ; v1(81.9,137.805) C7.2@83.35,137.805 ; v1(81.9,141.255) CT2.2@81.9,142.705 ; v1(81.9,144.155) CT2.2@81.9,142.705 ; v1@82.218,137.486 cw(c82.986,136.718) 82.986,137.805 cw(c82.986,138.891) v1@82.218,138.123 ; v1(82.3,119.805) C6.2@83.95,119.805 ; v1(82.4,122.305) C5.2@83.65,122.305 ; v1@82.618,119.486 cw(c83.386,118.718) 83.386,119.805 cw(c83.386,120.891) v1@82.618,120.123 ; v1@82.718,121.986 cw(c83.486,121.218) 83.486,122.305 cw(c83.486,123.391) v1@82.718,122.623 ; v1@87.8,103.805 C3.2@89.25,103.805 ; v1(87.9,99.105) C4.2@89.35,99.105 ; v1@88.218,98.786 cw(c88.986,98.018) 88.986,99.105 cw(c88.986,100.191) v1@88.218,99.423 ; v1@88.318,103.486 cw(c89.086,102.718) 89.086,103.805 cw(c89.086,104.891) v1@88.318,104.123 ; v1@89.182,88.923 ccw(c88.172,89.932) IC12.K@89.6,89.932 ; v1@89.394,88.711 ccw(c88.896,89.208) 89.6,89.208 ; v1(89.5,88.605) 89.6,88.705 IC12.K@89.6,90.455 ; 89.6,89.45 ccw(c90.345,89.45) v1@89.818,88.923 ; C12.2@101.7,128.65 101.7,127.9 102.4,127.2 108.2,127.2 109.1,128.1 C13.2@109.1,128.55
  Top Layer w0.5: v1@60.553,27.052 ccw(c59.955,27.65) 60.8,27.65 ccw(c61.645,27.65) v1@61.047,27.052 ; v1@60.553,35.757 cw(c59.955,35.16) 60.8,35.16 cw(c61.645,35.16) v1@61.047,35.757 ; v1(60.8,26.805) IC8.5@60.8,28.655 ; IC8.4@60.8,34.155 v1(60.8,36.005) ; v1@65.753,37.357 cw(c65.155,36.76) 66,36.76 cw(c66.845,36.76) v1@66.247,37.357 ; v1@65.853,25.552 ccw(c65.255,26.15) 66.1,26.15 ccw(c66.945,26.15) v1@66.347,25.552 ; C10.2@66,35.755 v1(66,37.605) ; v1(66.1,25.305) C11.2@66.1,27.155 ; v1@80.553,29.452 ccw(c79.955,30.05) 80.8,30.05 ccw(c81.645,30.05) v1@81.047,29.452 ; v1(80.8,29.205) IC3.K@80.8,31.055 ; CT1.2@96.7,95.305 98.7,95.305 99,95.605 v1(99,97.305) ; v1@98.753,97.057 cw(c98.155,96.46) 99,96.46 cw(c99.845,96.46) v1@99.247,97.057 ; IC4.4@100.859,98.49 ccw(c102.185,98.49) v1@101.247,97.552 ; 100.859,104.815 cw(c102.185,104.815) v1@101.247,105.753 ; v1(101,97.305) 100.859,97.446 IC4.4@100.859,101.405 ; v1@101,106.305 100.859,106.164 IC4.4@100.859,101.405 ; IC4.4@103.914,101.405 cw(c103.914,100.218) v1@104.753,101.057 ; 104.396,101.405 ccw(c104.396,101.908) v1@104.753,101.552 ; v1@104.65,99.305 ccw(c103.805,99.305) 104.403,99.902 ccw(c105,100.5) v1@105,99.655 ; v1@104.65,103.305 cw(c103.805,103.305) 104.403,102.707 cw(c105,102.11) v1@105,102.955 ; v1(105,99.305) IC4.4@102.9,101.405 ; v1(105,101.305) 104.9,101.405 IC4.4@103.1,101.405 ; v1(105,103.305) IC4.4@103.1,101.405 ; IC4.4@100.859,101.405 IC4.4@102.9,101.405 ; IC4.4@102.9,101.405 IC4.4@103.1,101.405
  Top Layer w1: v1(-1.1,118.405) CE3.2@2.35,118.405 ; v1(2.3,114.905) CE3.2@2.3,118.355 ; CE3.2@2.3,118.455 v1(2.3,121.905) ; v1(20.2,118.305) CE4.2@23.65,118.305 ; CE4.2@23.7,118.255 v1(23.7,114.805) 23.7,112.205 24,111.905 TP4.1@24,109.105 ; CE4.2@23.7,118.355 v1(23.7,121.805) ; v1(62.5,110.005) CE1.2@65.95,110.005 ; v1(66,106.505) CE1.2@66,109.955 ; CE1.2@66.05,110.005 v1(69.5,110.005) ; v1(73.5,109.905) CE5.2@76.95,109.905 ; v1(73.8,126.505) CE2.2@77.25,126.505 ; v1(77,106.405) CE5.2@77,109.855 ; CE5.2@77.05,109.905 v1(80.5,109.905) ; CE2.2@77.35,126.505 v1(80.8,126.505) ; v1(98,143) 98.9,143.9 IC13.2@99.1,143.9 ; v1(98,145) IC13.2@99.1,143.9 ; v1(100,153) v1(100,151) v1(100,149) IC13.2@104.1,144.9 ; v1(104,153) 104.1,152.9 IC13.2@104.1,144.9 ; v1@106.6,115.2 v1(106.65,115.25) CE6.2@106.65,117.8 v1(106.65,121) 106.65,126.95 CT3.2@106.7,127 ; v1(108,153) v1(108,151) v1(108,149) 108,147.8 IC13.2@104.1,143.9 ; v1(110,143) 109.1,143.9 IC13.2@108.9,143.9 ; v1(110,145) IC13.2@108.9,143.9 ; IC13.2@99.1,143.9 IC13.2@104.1,143.9 ; IC13.2@104.1,143.9 IC13.2@108.9,143.9 ; IC13.2@104.1,143.9 IC13.2@104.1,144.9
  Mid-Layer 1 w0.254: v1@46.3,8.505 v1(46.3,8.805)
  other v1: 46.55,11.95 47.65,11.95 46.55,13.05 47.65,13.05 50.5,72.7 50.5,75 50.5,77.4 28.9,93.5 31.2,93.5 33.6,93.5 101,95 103,95 105,95 107,95 109,95 110,97 103,97.305 105,97.305 108,98 110,99 108,100 106,100.305 110,101 108,102 106,102.305 110,103 88,103.805 108,104 110,105 99,106 101,106 103,106 105,106 107,106 110,107 96,135 98,135 96,137 98,137 96,139 98,139 96,141 98,141 110,141 96,143 96,145 96,147 98,147 110,147 96,149 98,149 102,149 104,149 106,149 110,149 96,151 98,151 102,151 104,151 106,151 110,151 96,153 98,153 102,153 106,153 110,153
NetCN3_PROG: CN3.PROG CN4.1 | length 6.4
  Top Layer w0.254: CN3.PROG@38.02,27.16 44.26,27.16 CN4.1@44.4,27.3
NetCN6_2: CN6.2 D1.2 R20.2 | length 17.5
  Top Layer w0.254: D1.2@19.5,132.005 19.6,132.105 R20.2@19.6,134.155
  Top Layer w1: CN6.2@11.25,128.605 CN6.2@11.25,132.105 CN6.2@13.75,132.105 ; CN6.2@13.75,128.605 CN6.2@13.75,132.105 ; D1.2@19.5,132.005 19.4,132.105 CN6.2@13.75,132.105
NetCN8_2: CN8.2 D2.2 R21.2 | length 17.8
  Top Layer w0.254: D2.2@33.9,132.005 34,132.105 R21.2@34,134.155
  Top Layer w1: CN8.2@25.25,128.505 CN8.2@25.25,132.005 CN8.2@27.75,132.005 ; CN8.2@27.75,128.505 CN8.2@27.75,132.005 ; D2.2@33.9,132.005 CN8.2@27.75,132.005
NetIC3_A: IC3.A R10.1 | length 2.3
  Top Layer w0.254: R10.1@80.7,35.255 80.8,35.155 IC3.A@80.8,32.955
NetIC5_A: IC5.A R11.1 | length 1.7
  Top Layer w0.254: IC5.A@86.655,153.1 R11.1@88.355,153.1
NetIC6_A: IC6.A R12.1 | length 1.7
  Top Layer w0.5: IC6.A@16.7,120.055 R12.1@16.7,121.755
NetIC7_10: IC7.10 IC7.11 | length 3
  Top Layer w0.254: IC7.11@46.775,14.6 46.775,15.68 46.9,15.805 47.4,15.805 47.425,15.78 IC7.10@47.425,14.6
NetIC9_A: IC9.A R19.1 | length 2
  Top Layer w0.254: R19.1@11.05,9.305 IC9.A@13.05,9.305
NetIC10_A: IC10.A R20.1 | length 1.6
  Top Layer w0.254: R20.1@19.6,135.655 IC10.A@19.6,137.255
NetIC11_A: IC11.A R21.1 | length 1.6
  Top Layer w0.254: R21.1@34,135.655 IC11.A@34,137.255
NetIC12_A: IC12.A R22.1 | length 3
  Top Layer w0.3: IC12.A@89.6,92.355 89.65,92.405 R22.1@89.65,95.305